# Altium PCB ArduinoUnoR0.PcbDoc (part 1 of 2)
Units mm, origin at the board's own origin, x right, y up, seen from the top; angles counter-clockwise.
Board outline 68.53 x 53.3 mm, 2 copper layers (Top Layer, Bottom Layer); 60 components, 49 nets, 220 pads, 58 vias.
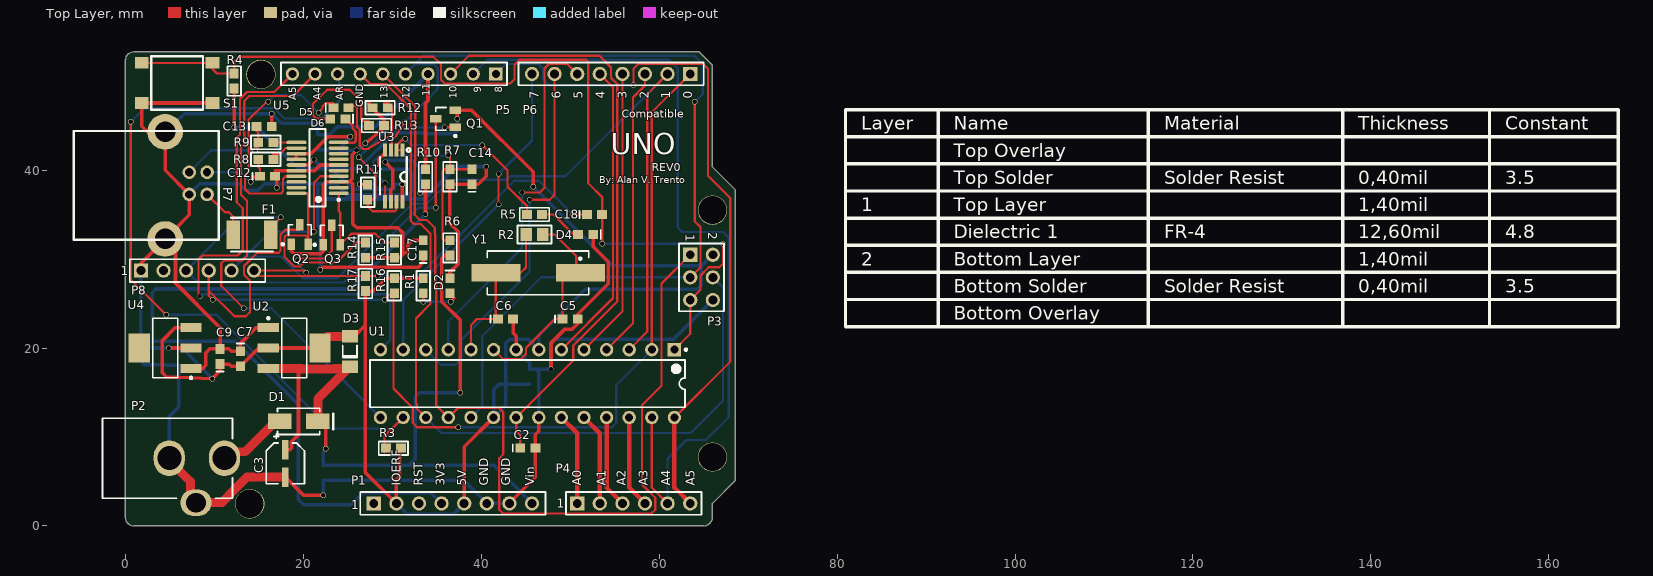
[diagram p0: Top Layer view]
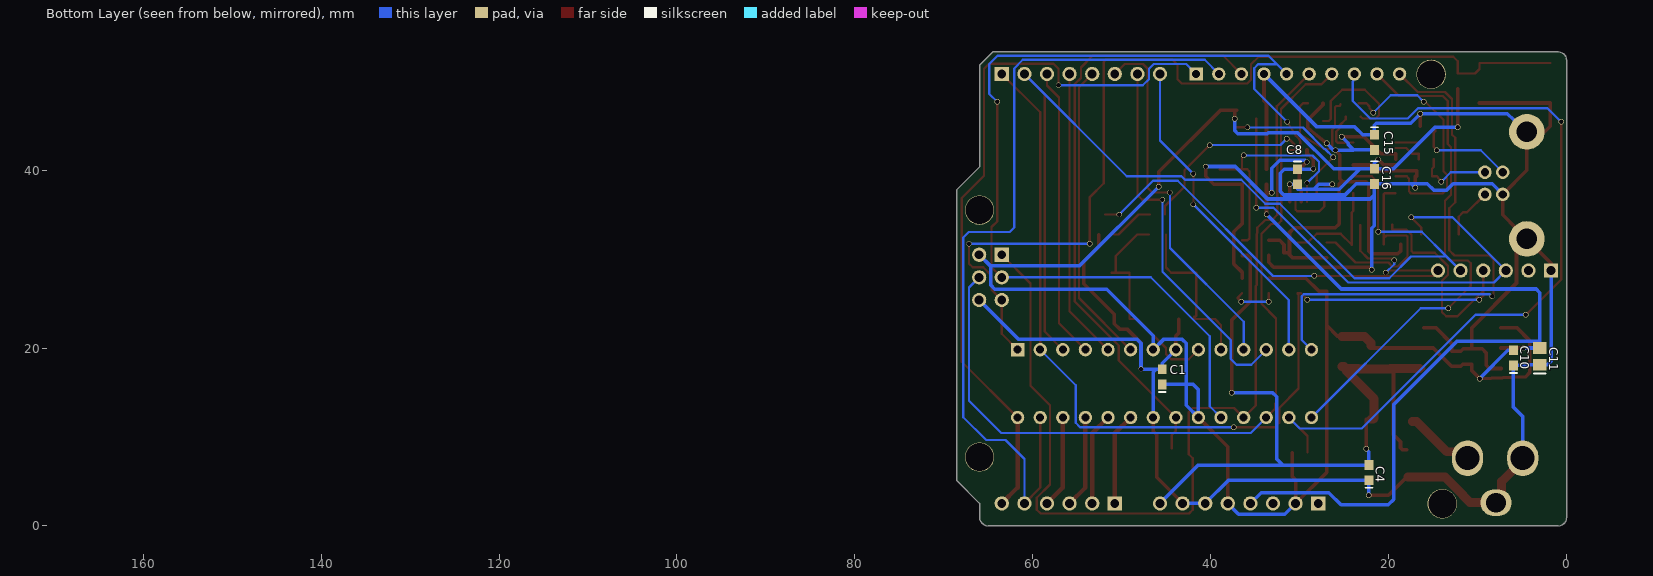
[diagram p1: Bottom Layer view, seen from below]
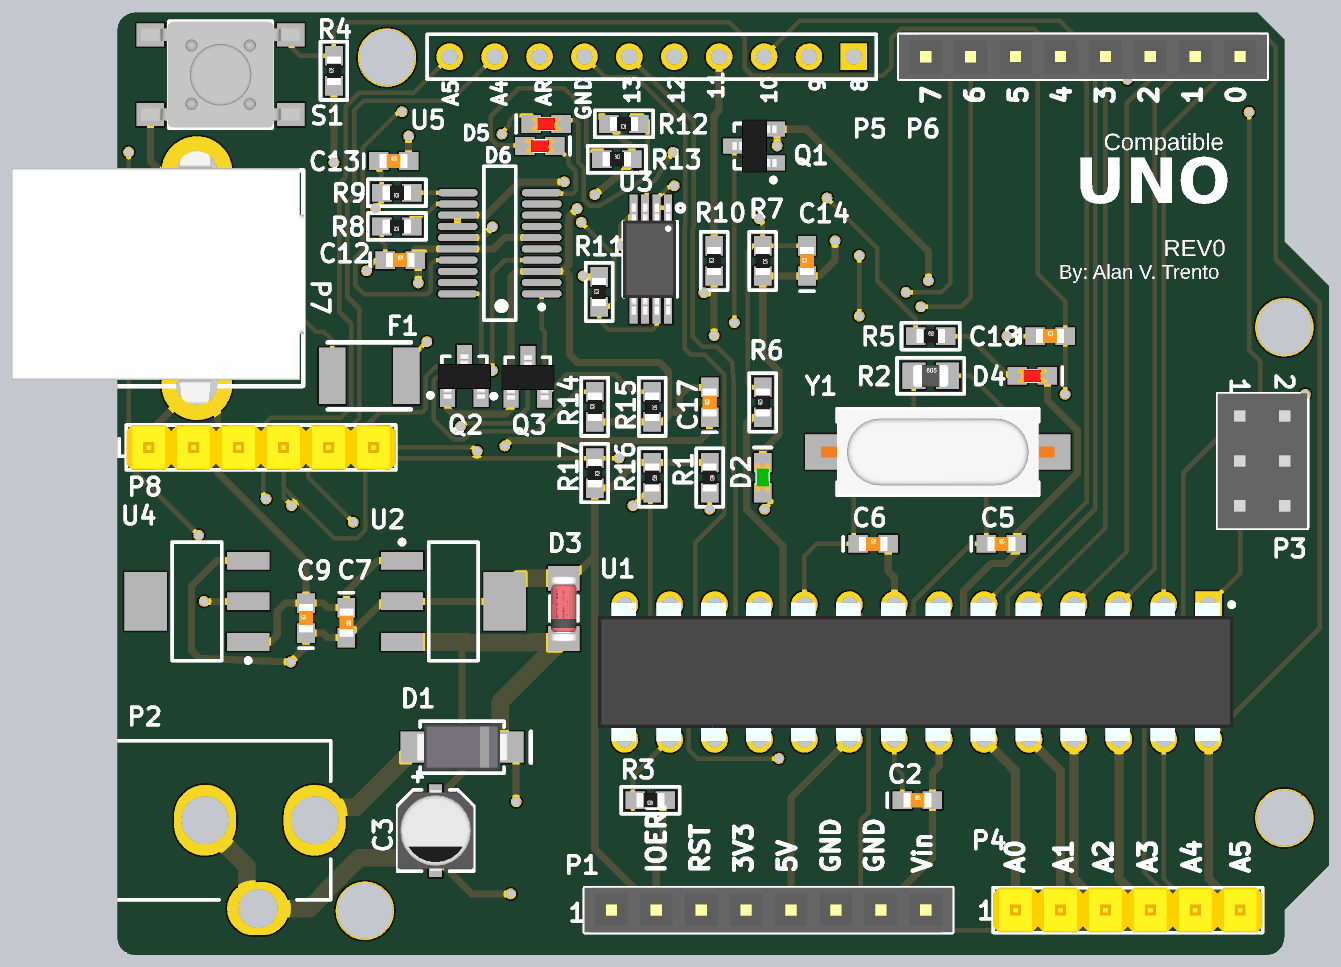
[diagram p2: 3D render of the assembled board from above, using the file's embedded part models]
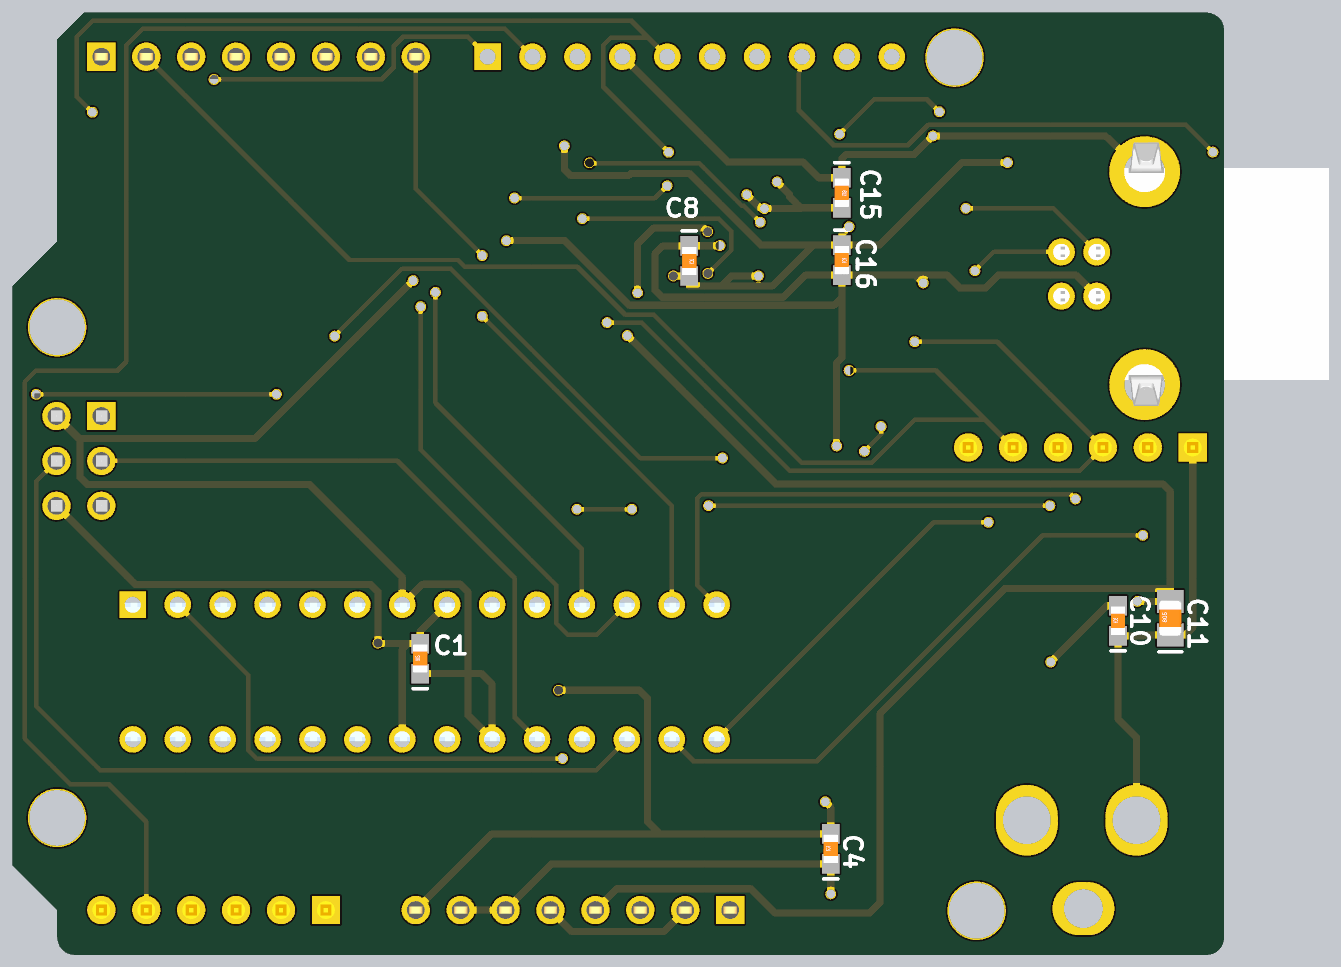
[diagram p3: 3D render of the assembled board from below, using the file's embedded part models]

## Layer stack, top to bottom
Top Solder: solder mask 0.0102, Solder Resist, Dk 3.5
Top Layer: signal copper 0.0356
Dielectric 1: dielectric 0.32, FR-4, Dk 4.8
Bottom Layer: signal copper 0.0356
Bottom Solder: solder mask 0.0102, Solder Resist, Dk 3.5

## Board outline
0.296,0.296 0.127,0.508 0.042,0.741 0,0.994 0,52.284 0.042,52.559 0.127,52.792 0.296,53.004 0.508,53.152 0.741,53.258 0.994,53.3 64.472,53.3 65.996,51.777 65.996,40.351 68.535,37.811 68.535,5.078 65.996,2.539 65.996,0.994 65.953,0.741 65.869,0.508 65.699,0.296 65.488,0.127 65.255,0.042 65.001,0 0.994,0 0.741,0.042 0.508,0.127

## Design rules (kind name [scope] priority, off if disabled: settings)
Clearance [All] p1: gap=0.2 ignorepadtopadclearanceinfootprint=FALSE
HoleSize [All] p1: absolutevalues=TRUE maxlimit=10 minlimit=0.025 maxpercent=80.000 minpercent=20.000
MinimumSolderMaskSliver [All] p1 off: minsoldermaskwidth=0.254
PolygonConnect [All] p1: connectstyle=Relief reliefconductorwidth=0.254 reliefentries=4 polygonreliefangle="90 Angle" airgapwidth=0.254
RoutingVias [All] p1: holewidth=0.508 width=0.61 viastyle="Through Hole" minholewidth=0.203 minwidth=0.406 maxholewidth=0.305 maxwidth=1.016
SilkToSilkClearance [All] p1 off: silktosilkclearance=0.254
SilkToSolderMaskClearance [IsPad] p1 off: minsilkscreentomaskgap=0.102 clearancetoexposedcopper=TRUE
SolderMaskExpansion [All] p1: expansion=0.102 istentingtop=FALSE
Width [InNetClass('OTHERS')] p1: maxlimit=0.5 minlimit=0.2 preferedwidth=0.254
Width Width_PowerNets [InNetClass('PowerNets')] p2: maxlimit=1 minlimit=0.254 preferedwidth=0.4
26 further rules are at their usual default settings.

## Classes and differential pairs
net class OTHERS: A0 A1 A2 A3 A4_SDA A5_SCL AREF D0_RX D1_TX D2 D3 D4 D5 D6 D7 D8 D9 D10_SS D11_MOSI D12_MISO D13_SCK DTR NetC5_1 NetC6_1 NetC12_1 NetC13_1 NetC14_2 NetD2_1 NetD4_1 NetD5_1 NetD5_2 NetD6_1 NetD6_2 NetF1_1 NetQ1_1 NetQ2_2 NetQ3_2 NetR5_1 NetR8_1 NetR9_1 R\S\T\ RST USB+
net class PowerNets: +3V3D +3V3E +5VD +VIN GND NetD1_1
component class U_Sheet2: C12 C13 C14 C15 C16 C17 C18 D5 D6 F1 P7 P8 Q1 Q2 Q3 R6 R7 R8 R9 R10 R11 R12 R13 R14 R15 R16 R17 U5
component class U_Sheet1: C1 C2 C3 C4 C5 C6 C7 C8 C9 C10 C11 D1 D2 D3 D4 P1 P2 P3 P4 P5 P6 R1 R2 R3 R4 R5 S1 U1 U2 U3 U4 Y1

## Components (designator, comment, footprint, x,y, rotation, side; value= is the part's Value field where it differs from the comment)
C1 "0.1uF 25V" C1608[0603] 45.466,16.764 r90 bottom value=1
C2 "0.1uF 25V" C1608[0603] 45.25,8.75 r0 top value=1
C3 "" Cap_Al_SMD_A5_4.3x4.3mm 18,7.024 r90 top value="47 uF 25V"
C4 "Capacitor" C1608[0603] 22.25,6 r90 bottom value="0.1uF 25V"
C5 "20pF" C1608[0603] 50,23.25 r0 top value=1
C6 "20pF" C1608[0603] 42.75,23.25 r0 top value=1
C7 "Capacitor" C1608[0603] 12.954,18.796 r270 top value="0.1uF 25V"
C8 "Capacitor" C1608[0603] 30.25,39.25 r270 bottom value="0.1uF 25V"
C9 "0.1uF 25V" C1608[0603] 10.668,19.05 r90 top value=1
C10 "0.1uF 25V" C1608[0603] 6,18.9 r90 bottom value=1
C11 "1uF 25V" C2012[0805] 3.048,19.05 r90 bottom
C12 "0.1uF 25V" C1608[0603] 16,39.298 r0 top value=1
C13 "0.1uF 25V" C1608[0603] 15.624,44.9 r0 top value=1
C14 "0.1uF 25V" C1608[0603] 39,39.25 r90 top value=1
C15 "0.1uF 25V" C1608[0603] 21.625,43.108 r270 bottom value=1
C16 "0.1uF 25V" C1608[0603] 21.625,39.298 r270 bottom value=1
C17 "0.1uF 25V" C1608[0603] 33.5,31.25 r90 top value=1
C18 "0.1uF 25V" C1608[0603] 52.75,35 r0 top value=1
D1 "B160-13-F" DO214AC 19.5,11.75 r0 top
D2 "LED" LED-0603-G 36.5,27 r90 top
D3 "LL4148" SOD-80/MLL34 25.25,19.602 r270 top
D4 "LED" LED-0603-R 51.75,32.75 r0 top
D5 "RX" LED-0603-R 24.25,47 r180 top
D6 "TX" LED-0603-R 23.9,45.75 r0 top
F1 "MF-MSMF050-2" MF-MSMF050 14.25,32.75 r0 top
P1 "Header 8" HDR1X8F 27.94,2.54 r0 top
P2 "Barrel Jack" BARREL2.5 -2.54,7.62 r0 top
P3 "ICSP" HDR2X3M 63.5,30.48 r270 top
P4 "Header 6" HDR1X6m 50.8,2.54 r0 top
P5 "IOH" HDR1X10 41.656,50.8 r180 top
P6 "IOL" HDR1X8F 63.5,50.8 r180 top
P7 "USB-B1HSB6" USB_Type_B 9.207,39.758 r270 top
P8 "PROG" HDR1X6m 1.778,28.702 r0 top
Q1 "FDN340P" SOT23 36,45.75 r90 top
Q2 "BSS138" SOT23 19.63,32.75 r0 top
Q3 "BSS138" SOT23 23.22,32.7 r0 top
R1 "270R" R1608[0603] 33.5,27 r270 top value=0
R2 "1M" R2012[0805] 46,32.75 r0 top value=0
R3 "100k" R1608[0603] 30.15,8.75 r180 top value=0
R4 "10k" R1608[0603] 12.25,50.006 r90 top value=0
R5 "560R" R1608[0603] 46,35 r0 top value=0
R6 "10k" R1608[0603] 36.5,31.25 r90 top value=0
R7 "10k" R1608[0603] 36.5,39.25 r270 top value=0
R8 "10k" R1608[0603] 15.807,41.203 r180 top value=0
R9 "10k" R1608[0603] 15.807,43.108 r180 top value=0
R10 "10k" R1608[0603] 33.75,39.25 r90 top value=0
R11 "10k" R1608[0603] 27.25,37.5 r90 top value=0
R12 "1k" R1608[0603] 28.65,47 r180 top value=0
R13 "1k" R1608[0603] 28.25,45 r0 top value=0
R14 "10k" R1608[0603] 27,31 r90 top value=0
R15 "10k" R1608[0603] 30.25,31 r270 top value=0
R16 "10k" R1608[0603] 30.25,27 r270 top value=0
R17 "10k" R1608[0603] 27,27.25 r270 top value=0
S1 "SW-PB" PB-SW-SMT 5.842,49.784 r180 top
U1 "ATmega328P-PU" DIP28 45.212,16.002 r270 top
U2 "Regulator" SOT223_N#1 19,20 r0 top
U3 "AMP Op" TSSOP8-1 31.15,42.25 r180 top
U4 "Regulator" SOT223_N#2 4.5,20 r180 top
U5 "FT231XS-R" NSSOP-20_N 21.625,40.25 r180 top
Y1 "16MHz" CRYSTAL-HC49/4H_SMX 46.402,28.448 r180 top

## Footprints (in the part's own frame and the unit in brackets; to place one, negate y for a bottom-side part, rotate by r counter-clockwise, add the part's x,y. Pads: shape width x height; smd on the part's side, far side on the other; paste and mask are expansions set on the pad)
BARREL2.5 [mm] "DC Power Jack, 2.5mm, KLD Series, PCB Mount"
  oval 3.5x4 hole 2.7: 1(13.7,0) 2(7.5,0)
  oval 3.5x3 hole 2.2: 3(10.5,-5)
  silkscreen extent 0,-4.5 14.6,4.5, body extent 0,-4.45 14.54,4.56, height 11
C1608[0603] [mm] "Chip Capacitor; Body 1.6 x 0.8 mm (LxW typ)"
  rect 1.1x1 smd: 1(-0.85,0) 2(0.85,0)
  silkscreen extent -1.7,-0.4 -1.7,0.4, body extent -0.8,-0.4 0.8,0.4, height 0.3
C2012[0805] [mm] "Chip Capacitor; Body 2.0 x 1.2 mm (LxW typ)"
  rect 1.3x1.5 smd: 1(-0.95,0) 2(0.95,0)
  silkscreen extent -1.9,-0.65 -1.9,0.65, body extent -1,-0.62 1,0.63, height 0.8
Cap_Al_SMD_A5_4.3x4.3mm [mm]
  rect 2.2x0.75 smd: 1(1.524,0) 2(-1.524,0)
  silkscreen extent -2.29,-2.15 3.31,2.15, body extent -2.29,-2.15 2.31,2.15, height 3.91
CRYSTAL-HC49/4H_SMX [mm] "Quartz Crystal, SM; Body 13.4 (inc. leads) x 4.9 mm (LxW max)"
  rect 5.5x2 smd: 1(-4.75,0) 2(4.75,0)
  silkscreen extent -5.7,-2.45 5.7,2.45, body extent -6.6,-2.4 6.6,2.4, height 4.32
DIP28 [mm] "28-Pin Plastic Dual In-Line Package (PDIP)"
  rect 1.5x1.5 hole 0.9: 1(-3.81,16.51)
  round 1.5 hole 0.9: 2(-3.81,13.97) 3(-3.81,11.43) 4(-3.81,8.89) 5(-3.81,6.35) 6(-3.81,3.81) 7(-3.81,1.27) 8(-3.81,-1.27) 9(-3.81,-3.81) 10(-3.81,-6.35) 11(-3.81,-8.89) 12(-3.81,-11.43) 13(-3.81,-13.97) 14(-3.81,-16.51) 15(3.81,-16.51) 16(3.81,-13.97) 17(3.81,-11.43) 18(3.81,-8.89) 19(3.81,-6.35) 20(3.81,-3.81) 21(3.81,-1.27) 22(3.81,1.27) 23(3.81,3.81) 24(3.81,6.35) 25(3.81,8.89) 26(3.81,11.43) 27(3.81,13.97) 28(3.81,16.51)
  silkscreen extent -3.93,-17.7 2.65,17.94, body extent -3.94,-18.03 3.94,17.91, height 4.65
DO214AC [mm]
  rect 2.65x1.75 smd: 1(-2.15,0) 2(2.15,0)
  silkscreen extent -2.37,-1.47 3.89,1.47, body extent -2.6,-1.3 2.6,1.3, height 2.4
HDR1X6m [mm] "Connector; Header; 6 Position"
  rect 1.6x1.6 hole 1: 1(0,0)
  round 1.6 hole 1: 2(2.54,0) 3(5.08,0) 4(7.62,0) 5(10.16,0) 6(12.7,0)
  silkscreen extent -1.27,-1.27 13.97,1.27, body extent -1.27,-1.27 13.97,1.27, height 9.55
HDR1X8F [mm] "Connector; Header; 8 Position"
  rect 1.6x1.6 hole 1: 1(0,0)
  round 1.6 hole 1: 2(2.54,0) 3(5.08,0) 4(7.62,0) 5(10.16,0) 6(12.7,0) 7(15.24,0) 8(17.78,0)
  silkscreen extent -1.52,-1.27 19.3,1.27, body extent -1.52,-1.27 19.3,1.27, height 8.55
HDR1X10 [mm] "Connector; Header; 10 Position"
  rect 1.5x1.5 hole 0.9: 1(0,0)
  round 1.5 hole 0.9: 2(2.54,0) 3(5.08,0) 4(7.62,0) 5(10.16,0) 6(12.7,0) 7(15.24,0) 8(17.78,0) 9(20.32,0) 10(22.86,0)
  silkscreen extent -1.27,-1.27 24.13,1.27
HDR2X3M [mm] "Connector; Header; 3x2 Position"
  rect 1.6x1.6 hole 1: 1(0,0)
  round 1.6 hole 1: 2(0,2.54) 3(2.54,0) 4(2.54,2.54) 5(5.08,0) 6(5.08,2.54)
  silkscreen extent -1.27,-1.27 6.35,3.81, body extent -1.27,-1.27 6.35,3.77, height 8.5
LED-0603-G [mm] "0603 Green LED"
  rect 1.1x1 smd: 1(-0.85,0) 2(0.85,0)
  silkscreen extent 1.7,-0.5 1.7,0.5, body extent -0.8,-0.4 0.8,0.4, height 0.6
LED-0603-R [mm] "0603 Red LED"
  rect 1.1x1 smd: 1(-0.85,0) 2(0.85,0)
  silkscreen extent 1.7,-0.5 1.7,0.5, body extent -0.8,-0.4 0.8,0.4, height 0.6
MF-MSMF050 [mm] "Resettable Fuse"
  rect 1.5x3.2 smd: 1(-2.1,0) 2(2.1,0)
  silkscreen extent -2.35,-1.9 2.35,1.9, body extent -2.35,-1.7 2.35,1.7, height 0.85
NSSOP-20_N [mm] "SOP, 20-Leads, Body 8.6x3.9mm, Pitch 0.635mm, IPC Medium Density"
  oval 2.25x0.4 smd: 1(-2.375,2.857) 2(-2.375,2.222) 3(-2.375,1.587) 4(-2.375,0.952) 5(-2.375,0.317) 6(-2.375,-0.318) 7(-2.375,-0.953) 8(-2.375,-1.588) 9(-2.375,-2.223) 10(-2.375,-2.858) 11(2.375,-2.858) 12(2.375,-2.223) 13(2.375,-1.588) 14(2.375,-0.953) 15(2.375,-0.318) 16(2.375,0.317) 17(2.375,0.952) 18(2.375,1.587) 19(2.375,2.222) 20(2.375,2.857)
  silkscreen extent -2.5,-4.35 0.9,4.35, body extent -1.99,-4.37 1.99,4.37, height 1.76
PB-SW-SMT [mm] "SMT TACT SWITCH 6MM"
  rect 1.55x1.3 smd: 1(-3.975,2.25) 1(3.975,2.25) 2(-3.975,-2.25) 2(3.975,-2.25)
  silkscreen extent -2.9,-3 2.9,3, body extent -4.5,-3 4.5,3, height 4.3
R1608[0603] [mm] "Chip Resistor; Body 1.6 x 0.8 mm (LxW typ)"
  rect 1.1x1 smd: 1(-0.85,0) 2(0.85,0)
  silkscreen extent -1.65,-0.76 1.65,0.76, body extent -0.8,-0.4 0.8,0.4, height 0.3
R2012[0805] [mm] "Chip Resistor; Body 2.0 x 1.3 mm (LxW typ)"
  rect 1.3x1.5 smd: 1(-0.95,0) 2(0.95,0)
  silkscreen extent -1.91,-1.02 1.9,1.02, body extent -1,-0.62 1,0.63, height 0.8
SOD-80/MLL34 [mm] "Metal Electrode Face (MELF) Diode; Body 3.5 x 1.7 mm (LxDia)"
  rect 1.4x1.8 smd: 1(-1.7,0) 2(1.7,0)
  silkscreen extent -0.7,-0.8 0.7,0.8, body extent -1.82,-0.8 1.88,0.8, height 1.6
SOT23 [mm] "SOT-23; 3 Leads; Body 3.0 x 2.6 mm, inc. leads (LxW max)"
  rect 0.85x1.3 smd: 1(-0.95,-1.1) 2(0.95,-1.1) 3(0,1.1)
  silkscreen extent -2.05,-1.22 1.28,1.1, body extent -1.5,-1.29 1.5,1.21, height 1.12
SOT223_N#1 [mm] "SOT223, 4-Leads, Body 6.5x3.5mm, Pitch 2.3mm, Lead Span 7mm, IPC Medium Density"
  rect 2.4x1 smd: 1(-2.9,2.3) 2(-2.9,0) 3(-2.9,-2.3)
  rect 2.4x3.3 smd: 2(2.9,0)
  silkscreen extent -3.02,-3.35 1.4,3.47, body extent -1.85,-3.35 1.85,3.35, height 1.7
SOT223_N#2 [mm] "SOT223, 4-Leads, Body 6.5x3.5mm, Pitch 2.3mm, Lead Span 7mm, IPC Medium Density"
  rect 2.4x1 smd: 1(-2.9,2.3) 2(-2.9,0) 3(-2.9,-2.3)
  rect 2.4x3.3 smd: 4(2.9,0)
  silkscreen extent -3.03,-3.35 1.4,3.47, body extent -1.85,-3.35 1.85,3.35, height 1.7
TSSOP8-1 [mm] "Footprint TSSOP81"
  rect 0.45x1.5 smd: 1(0,0) 2(0.65,0) 3(1.3,0) 4(1.95,0) 5(1.95,5.8) 6(1.3,5.8) 7(0.65,5.8) 8(0,5.8)
  silkscreen extent -0.9,-0.2 2.5,5, body extent -0.45,-0.24 2.55,6.04, height 1.09
USB_Type_B [mm]
  round 1.524 hole 0.92: 1(2.5,0) 2(0,0) 3(0,-2) 4(2.5,-2)
  round 4 hole 2.3: 5(-4.54,-4.71) 6(7.5,-4.71)
  silkscreen extent -4.62,-14.99 7.58,1.3, body extent -6.2,-15.15 8.7,1.35, height 10.7

## Part data
C1 C2 C9 C10 C12 C13 C14 C15 C16 C17 C18: library part C, "Capacitor", Capacitance=100nF, Case Code (Imperial)=0603, Case Code (Metric)=1608, Dielectric=X7R, Manufacturer Part Number=GCM188R71E104KA57D, Max Operating Temperature=125°C, Min Operating Temperature=-55°C, Package Quantity=4000, Ratings=AEC-Q200, Supplier Part Number 1=GCM188R71E104KA57D-ND, Tolerance=10%, Voltage=25V, Case/Package=0603, Depth=0.8mm, Height=0.8mm, Lead Free="Lead Free", Length=1.6mm, Mount="Surface Mount", Packaging="Tape and Reel", Radiation Hardening=No, Stock 1=0, Supplier 1=Digi-Key, Termination=SMD/SMT, Thickness=0.035inch, Voltage Rating=25V, Voltage Rating (DC)=25V, Width=0.8mm
C3: library part CP, "Polarized Capacitor"
C4 C7 C8: library part C
C5 C6: library part C, "Capacitor", Case Code (Imperial)=0603, Case Code (Metric)=1608, Dielectric=C0G, Manufacturer Part Number=CL10C200JB8NNNC, Max Operating Temperature=125°C, Min Operating Temperature=-55°C, Package Quantity=1, Supplier Part Number 1=1276-1187-6-ND, Temperature Coefficient=300ppm/°C, Tolerance=5%, Voltage=50V, Capacitance=20pF, Case/Package=0603, Depth=0.8mm, Height=0.8mm, Length=1.6mm, Mount="Surface Mount", Packaging="Tape and Reel", Pricing 1="1=0.1, 10=0.048, 100=0.0214, 500=0.01532, 1000=0.01203 (USD)", Radiation Hardening=No, Stock 1=40000, Supplier 1=Digi-Key, Thickness=0.035inch, Voltage Rating=50V, Width=0.031inch
C11: library part C, "Capacitor", Capacitance=1uF, Case Code (Imperial)=0805, Case Code (Metric)=2012, Dielectric=X7R, Dielectric Material=Ceramic, Manufacturer=TDK, Manufacturer Part Number=C2012X7R1E105K125AB, Max Operating Temperature=125°C, Min Operating Temperature=-55°C, Package Quantity=1, Supplier Part Number 1=445-1354-1-ND, Tolerance=10%, Voltage=25V, Case/Package=0805, Composition=Ceramic, Depth=1.25mm, Height=1.25mm, Lead Free="Lead Free", Length=2mm, Mount="Surface Mount", Number of Pins=2, Packaging="Tape and Reel", Pricing 1="1=0.16, 10=0.115, 100=0.054, 500=0.0379, 1000=0.03137 (USD)", Radiation Hardening=No, REACH SVHC="No SVHC", Stock 1=0, Supplier 1=Digi-Key, Termination=SMD/SMT, Thickness=0.057inch, Voltage Rating=25V, Voltage Rating (DC)=25V, Weight=0.000194oz, Width=1.25mm
D1 D3: library part D, "Diode"
D2: Supplier Part Number 1=31AK5817, Supplier 1=Newark
D4: Case Code (Imperial)=0603, Case Code (Metric)=1608, Colour=Red, Current=2A, Forward Current=30mA, Forward Voltage=2V, Lens Colour=Colorless, Manufacturer Part Number=LTST-C191KRKT, Max Operating Temperature=85°C, Min Operating Temperature=-55°C, Package Quantity=1, Power Dissipation=75mW, Reverse Voltage=5V, Supplier Part Number 1=160-1447-6-ND, Test Current=20mA, Case/Package=0603, Depth=0.8mm, Dominant Wavelength=631nm, Height=0.55mm, Illumination Colour=Red, Lead Free="Lead Free", Length=1.6mm, Lens Style=Clear,Colorless,Diffused,Rectangular, Lens Transparency=Clear, Luminous Intensity=54mcd, Mount="Surface Mount", Number of Elements=1, Number of LEDs=1, Number of Pins=2, Packaging="Tape and Reel", Power Rating=75mW, Pricing 1="1=0.29, 10=0.211, 25=0.1556, 100=0.1111, 250=0.07556, 500=0.06666, 1000=0.05222, 2500=0.05111 (USD)", Radiation Hardening=No, Stock 1=978989, Supplier 1=Digi-Key, Viewing Angle=130°, Voltage=2V, Wavelength=639nm, Width=0.8mm
D5 D6: library part LED, "LED", Case Code (Imperial)=0603, Case Code (Metric)=1608, Colour=Yellow, Forward Current=30mA, Forward Voltage=2.4V, Lens Colour=Clear,Colorless, Manufacturer Part Number=LTST-C190KSKT, Max Operating Temperature=85°C, Min Operating Temperature=-55°C, Package Quantity=1, Power Dissipation=75mW, Reverse Voltage=5V, Supplier Part Number 1=160-1437-1-ND, Test Current=20mA, Case/Package=0603, Depth=1.6mm, Dominant Wavelength=597nm, Height=0.8mm, Illumination Colour=Yellow, Lead Free="Lead Free", Length=3.2mm, Lens Style=Clear,Colorless,Diffused,Rectangular, Lens Transparency=Clear, Luminous Intensity=180mcd, Mount="Surface Mount", Number of Elements=1, Number of LEDs=1, Number of Pins=2, Packaging="Tape and Reel", Power Rating=75mW, Pricing 1="1=0.29, 10=0.215, 25=0.16, 100=0.1153, 250=0.0798, 500=0.07088, 1000=0.05644 (USD)", Radiation Hardening=No, Stock 1=422639, Supplier 1=Digi-Key, Viewing Angle=130°, Wavelength=588nm, Width=0.8mm
F1: "Resettable Fuse", Case Code (Imperial)=1812, Case Code (Metric)=4532, Current Rating=100A, Hold Current=500mA, Max Operating Temperature=85°C, Min Operating Temperature=-40°C, Operating Supply Voltage=15V, Package Quantity=2000, Power Dissipation=800mW, Resistance=150mR, Supplier Part Number 1=MF-MSMF050-2DKR-ND, Trip Current=1A, Approvals=CSA,TUV,UL, Case/Package=1812, Contact Plating=Gold, Height=0.85mm, Lead Free="Lead Free", Length=4.73mm, Manufacturer Part Number=MF-MSMF050-2, Max Current Rating=100A, Mount="PCB,Surface Mount", Number of Terminals=2, Packaging="Tape and Reel", Pricing 1="1=0.47, 5=0.456, 10=0.441, 50=0.3712, 100=0.3082, 250=0.2802, 500=0.23816, 1000=0.21014 (USD)", Radiation Hardening=No, REACH SVHC="No SVHC", Stock 1=179041, Supplier 1=Digi-Key, Terminal Material=Gold, Termination=SMD/SMT, Time to Trip=0.15s, Voltage Rating=15V, Voltage Rating (DC)=15V, Width=3.41mm
P1: "Header, 8-Pin", LatestRevisionDate=17-Jul-2002, LatestRevisionNote="Re-released for DXP Platform.", Publisher="Altium Limited"
P2: library part PWR2.5, "Low Voltage Power Supply Connector", Manufacturer="Memory Protection Devices", Manufacturer Part Number=EJ503A, Supplier Part Number 1=EJ503A-ND, Pricing 1="1=2.7, 10=2.447, 100=2.0977, 500=1.74806, 1000=1.49834 (USD)", Stock 1=1084, Supplier 1=Digi-Key
P3: library part "Header 3X2", "Header, 3-Pin, Dual row", Colour=Black, Contact Resistance=25mR, Manufacturer=Harwin, Manufacturer Part Number=M20-9720345, Max Current Rating=3A, Max Operating Temperature=105°C, Min Operating Temperature=-40°C, Package Quantity=1000, Supplier Part Number 1=952-1921-ND, Connector Type="Male Pin", Contact Material=Brass, Contact Mating Length=0.276inch, Contact Plating=Gold, Depth=5.08mm, Gender=Male, Housing Colour=Black, Housing Material=Nylon, LatestRevisionDate=17-Jul-2002, LatestRevisionNote="Re-released for DXP Platform.", Length=7.62mm, Mount="Through Hole", Number of Contacts=6, Number of Positions=6, Number of Rows=2, Orientation=Straight, Packaging=Bulk, Pitch=2.54mm, Pricing 1="1=0.33, 10=0.308, 100=0.2156, 500=0.1848, 1000=0.154, 5000=0.132, 10000=0.1232 (USD)", Publisher="Altium Limited", Radiation Hardening=No, Row Spacing=0.1inch, Stock 1=4637, Supplier 1=Digi-Key, Termination=Solder
P4: "Header, 6-Pin", LatestRevisionDate=17-Jul-2002, LatestRevisionNote="Re-released for DXP Platform.", Publisher="Altium Limited"
P5: library part "Header 10", "Header, 10-Pin", LatestRevisionDate=17-Jul-2002, LatestRevisionNote="Re-released for DXP Platform.", Publisher="Altium Limited"
P6: library part "Header 8", "Header, 8-Pin", Colour=Black, Manufacturer=Sullins, Manufacturer Part Number=PPTC081LFBN-RC, Package Quantity=1000, Supplier Part Number 1=S7006-ND, Connector Type=Header,Socket, Contact Material=Bronze, Contact Plating=Tin, Height=8.5mm, Housing Material=Plastic, LatestRevisionDate=17-Jul-2002, LatestRevisionNote="Re-released for DXP Platform.", Lead Free="Lead Free", Length=20.8mm, Mount="Through Hole", Number of Positions=8, Number of Rows=1, Packaging=Bulk, Pitch=0.1inch, Pricing 1="1=0.65, 10=0.608, 400=0.42525, 800=0.3645, 1200=0.33413, 5200=0.29363, 10000=0.2925 (USD)", Publisher="Altium Limited", Stock 1=21933, Supplier 1=Digi-Key, Termination=Solder, Width=2.5mm
P7: library part "USB Type B", "Conn USB Type B RCP 4 POS 2.5mm Solder RA Thru-Hole 4 Terminal 1 Port", Manufacturer="On-Shore Technology", Package Quantity=50, Category=Connectors, ComponentLink1Description=https://datasheet.ciiva.com/851/usb-b1hsxx-851167.pdf?src-supplier=Digi-Key, ComponentLink1URL=https://datasheet.ciiva.com/851/usb-b1hsxx-851167.pdf?src-supplier=Digi-Key, Connector Type=USB, Gender=Receptacle, Manufacturer Part Number=USB-B1HSB6, Mount="Through Hole,Horizontal", Number of Contacts=4, Packaging=Tray, Pricing 1="1=1,04980, 10=0,96820, 25=0,84920, 50=0,81630, 100=0,71590, 500=0,70860 (USD)", RoHS=Yes, RoHS Compliant=Yes, Stock 1=72, Supplier 1="Arrow Electronics", Supplier Part Number 1=USB-B1HSB6
P8: library part "Header 6", "Header, 6-Pin", Colour=Black, Current Rating=3A, Flammability Rating="UL94 V-0", Insulation Resistance=5GR, Manufacturer="Amphenol FCI", Manufacturer Part Number=68000-406HLF, Max Operating Temperature=125°C, Max Voltage Rating (AC)=1.5kV, Min Operating Temperature=-65°C, Package Quantity=100, Supplier Part Number 1=609-3263-ND, Connector Type="Male Pin", Contact Gender=Male, Contact Material=Bronze, Contact Mating Length=0.23inch, Contact Plating=Tin, Depth=2.41mm, Gender=Male, Housing Colour=Black, Housing Material=Thermoplastic, LatestRevisionDate=17-Jul-2002, LatestRevisionNote="Re-released for DXP Platform.", Length=15.24mm, Mating Post Length=5.84mm, Mount="Through Hole", Number of Contacts=6, Number of Positions=6, Number of Rows=1, Orientation=Straight, Packaging=Bulk, Pitch=2.54mm, Pricing 1="1=0.26, 10=0.245, 100=0.1695, 500=0.14344, 1000=0.11736, 5000=0.10432, 10000=0.09454 (USD)", Publisher="Altium Limited", Radiation Hardening=No, REACH SVHC="No SVHC", Stock 1=7266, Supplier 1=Digi-Key, Termination=Solder, Termination Post Length=2.41mm, Voltage Rating=1.5kV
Q1: library part MOSFET-P, "P-Channel MOSFET", Case/Package=SOT-23, Continuous Drain Current (ID)=2A, Current Rating=-2A, Drain to Source Breakdown Voltage=-20V, Drain to Source Resistance=60mR, Drain to Source Voltage (Vdss)=20V, Gate to Source Voltage (Vgs)=8V, Input Capacitance=779pF, Max Operating Temperature=150°C, Max Power Dissipation=500mW, Min Operating Temperature=-55°C, On-State Resistance=70MR, Package Quantity=1, Supplier Part Number 1=FDN340PDKR-ND, Threshold Voltage=-800mV, Contact Plating=Matte,Tin, Dual Supply Voltage=-20V, Element Configuration=Single, Fall Time=11ns, Height=0.94mm, Lead Free="Lead Free", Length=2.92mm, Manufacturer Part Number=FDN340P, Mount="Surface Mount", Nominal Vgs=-800mV, Number of Elements=1, Number of Pins=3, Packaging="Tape and Reel", Power Dissipation=500mW, Radiation Hardening=No, Rds On Max=70mR, REACH SVHC="No SVHC", Rise Time=9ns, Stock 1=0, Supplier 1=Digi-Key, Termination=SMD/SMT, Turn-Off Delay Time=27ns, Turn-On Delay Time=10ns, Voltage Rating (DC)=-20V, Weight=0.03g, Width=3.05mm
Q2 Q3: library part MOSFET-N, "N-Channel MOSFET", Case/Package=SOT-23, Continuous Drain Current (ID)=220mA, Drain to Source Breakdown Voltage=50V, Drain to Source Resistance=3.5R, Gate to Source Voltage (Vgs)=20V, Input Capacitance=27pF, Max Operating Temperature=150°C, Max Power Dissipation=360mW, Min Operating Temperature=-55°C, On-State Resistance=6R, Package Quantity=1, Supplier Part Number 1=BSS138CT-ND, Threshold Voltage=1.3V, Contact Plating=Matte,Tin, Current Rating=220mA, Drain to Source Voltage (Vdss)=50V, Dual Supply Voltage=50V, Element Configuration=Single, Fall Time=9ns, Height=0.93mm, Lead Free="Lead Free", Length=2.92mm, Manufacturer Part Number=BSS138, Mount="Surface Mount", Nominal Vgs=1.3V, Number of Elements=1, Number of Pins=3, Packaging="Tape and Reel", Power Dissipation=360mW, Radiation Hardening=No, Rds On Max=3.5R, REACH SVHC="No SVHC", Rise Time=9ns, Stock 1=0, Supplier 1=Digi-Key, Termination=SMD/SMT, Turn-Off Delay Time=20ns, Turn-On Delay Time=2.5ns, Voltage Rating (DC)=50V, Weight=0.03g, Width=1.3mm
R1: library part R, "Resistor"
R2: library part R, "Resistor", Case Code (Imperial)=0805, Case Code (Metric)=2012, Manufacturer Part Number=ERA-6AEB105V, Max Operating Temperature=155°C, Max Power Dissipation=125mW, Min Operating Temperature=-55°C, Package Quantity=1, Resistance=1MR, Supplier Part Number 1=P1MDADKR-ND, Temperature Coefficient=25ppm/°C, Tolerance=1%, Voltage Rating=100V, Case/Package=0805, Composition="Thin Film", Contact Plating=Tin, Depth=1.25mm, Features="Automotive AEC-Q200", Height=0.5mm, Lead Free="Lead Free", Length=2mm, Military Standard=Not, Mount="Surface Mount", Number of Pins=2, Number of Terminations=2, Packaging="Tape and Reel", Power Rating=125mW, Pricing 1="1=0.36, 10=0.302, 100=0.1182, 1000=0.04948, 2500=0.04536 (USD)", Radiation Hardening=No, REACH SVHC="No SVHC", Stock 1=150805, Supplier 1=Digi-Key, Termination=Solder, Voltage Rating (DC)=100V, Width=1.25mm, Working Voltage=100V
R3: library part R, "Resistor", Case Code (Imperial)=0603, Case Code (Metric)=1608, Manufacturer Part Number=MCT06030C1003FP500, Max Operating Temperature=125°C, Max Power Dissipation=125mW, Min Operating Temperature=-55°C, Package Quantity=1, Power Rating=100mW, Resistance=100kR, Supplier Part Number 1=MCT0603-100K-CFDKR-ND, Temperature Coefficient=50ppm/°C, Tolerance=1%, Voltage Rating=75V, Case/Package=0603, Composition="Thin Film", Contact Plating=Tin, Depth=0.85mm, Height=0.022inch, Lead Free="Lead Free", Length=1.55mm, Military Standard=Not, Mount="Surface Mount", Number of Terminations=2, Packaging="Tape and Reel", Pricing 1="1=0.18, 10=0.152, 100=0.0596, 1000=0.02495, 2500=0.02287 (USD)", Radiation Hardening=No, REACH SVHC=Unknown, Stock 1=0, Supplier 1=Digi-Key, Termination=SMD/SMT, Voltage Rating (DC)=75V, Weight=7.1E-05oz, Width=0.033inch
R4 R6 R7 R8 R9 R10 R11 R14 R15 R16 R17: library part R, "Resistor", Case Code (Imperial)=0603, Case Code (Metric)=1608, Manufacturer Part Number=MCT06030C1002FP500, Max Operating Temperature=125°C, Max Power Dissipation=125mW, Min Operating Temperature=-55°C, Package Quantity=1, Power Rating=100mW, Resistance=10kR, Supplier Part Number 1=MCT0603-10.0K-CFDKR-ND, Temperature Coefficient=50ppm/°C, Tolerance=1%, Voltage Rating=75V, Case/Package=0603, Composition="Thin Film", Contact Plating=Tin, Depth=0.85mm, Height=0.022inch, Lead Free="Lead Free", Length=1.55mm, Military Standard=Not, Mount="Surface Mount", Number of Terminations=2, Packaging="Tape and Reel", Pricing 1="1=0.18, 10=0.152, 100=0.0596, 1000=0.02495, 2500=0.02287 (USD)", Radiation Hardening=No, REACH SVHC=Unknown, Stock 1=1373195, Supplier 1=Digi-Key, Voltage Rating (DC)=75V, Width=0.8mm
R5: library part R, "Resistor", Case Code (Imperial)=0603, Case Code (Metric)=1608, Manufacturer Part Number=AC0603FR-07560RL, Max Operating Temperature=155°C, Max Power Dissipation=100mW, Min Operating Temperature=-55°C, Supplier Part Number 1=YAG3618DKR-ND, Temperature Coefficient=100ppm/°C, Tolerance=1%, Voltage Rating=50V, Case/Package=0603, Composition="Thick Film", Features="Automotive AEC-Q200,Moisture Resistant", Height=0.022inch, Lead Free="Lead Free", Length=0.063inch, Number of Terminations=2, Packaging="Tape and Reel", Power Rating=100mW, Pricing 1="1=0.1, 10=0.032, 100=0.0129, 1000=0.00579, 2500=0.00502 (USD)", Resistance=560R, Stock 1=31951, Supplier 1=Digi-Key, Termination=SMD/SMT, Weight=7.1E-05oz, Width=0.8mm
R12 R13: library part R, "Resistor", Case Code (Imperial)=0603, Case Code (Metric)=1608, Manufacturer Part Number=ESR03EZPJ102, Max Operating Temperature=155°C, Max Power Dissipation=250mW, Min Operating Temperature=-55°C, Package Quantity=1, Resistance=1kR, Supplier Part Number 1=RHM1.0KDDKR-ND, Temperature Coefficient=200ppm/°C, Tolerance=5%, Case/Package=0603, Composition="Thick Film", Features="Automotive AEC-Q200", Height=0.022inch, Lead Free="Lead Free", Length=0.063inch, Number of Terminations=2, Packaging="Tape and Reel", Pricing 1="1=0.1, 10=0.087, 100=0.0333, 1000=0.01464, 2500=0.01264 (USD)", Stock 1=384185, Supplier 1=Digi-Key, Width=0.031inch
S1: library part "SW Tact", "Tactile Switch", Case/Package=SMD/SMT, Colour=Black, Contact Resistance=100mR, Current Rating=50mA, Manufacturer Part Number=PTS645SM43SMTR92LFS, Max Operating Temperature=60°C, Max Voltage Rating (DC)=12V, Min Operating Temperature=-20°C, Operating Force=160gf, Package Quantity=1000, Supplier Part Number 1=CKN9112DKR-ND, Actuator Length=0.85mm, Actuator Material=Nylon,Polyamide, Actuator Type=Standard, Contact Material=Silver, Contact Plating=Silver, Depth=9mm, Illumination Type=Illuminated,Non-Illuminated, Lead Free="Lead Free", Length=6mm, Max Current Rating=50mA, Mechanical Life=100000Cycles, Mount="Surface Mount", Orientation=Straight, Packaging="Tape and Reel", Pricing 1="1=0.16, 10=0.157, 25=0.1516, 50=0.1462, 100=0.1381, 250=0.12996, 500=0.12452 (USD)", REACH SVHC="No SVHC", Stock 1=477790, Supplier 1=Digi-Key, Switch Function=Off-Mom, Termination="Gull Wing", Throw Configuration=SPST, Voltage Rating (DC)=12V
U1: "8-bit AVR Microcontroller, 32KB Flash, 1KB EEPROM, 2KB SRAM, 28-pin PDIP, Industrial Grade (-40°C to 85°C)", ComponentLink1Description="Manufacturer URL", ComponentLink1URL=http://www.atmel.com/, ComponentLink2Description="ATmega48A/48PA/88A/88PA/168A/168PA/328/328P Datasheet", ComponentLink2URL=http://www.atmel.com/dyn/resources/prod_documents/8271.pdf, ComponentLink3Description="ATmega48A/48PA/88A/88PA/168A/168PA/328/328P Summary", ComponentLink3URL=http://www.atmel.com/dyn/resources/prod_documents/8271S.pdf, DatasheetVersion="revD, May-2011", PackageDescription="28-lead (0.300\"/7.62mm Wide) Plastic Dual Inline Package (PDIP)", PackageReference=28P3, PackageVersion="revB, Sep-2001"
U2: Package Type=NCP1117ST50T3G
U3: library part LM358PWR, "IC OPAMP GP 700KHZ 8TSSOP", Case/Package=TSSOP, Input Bias Current=250nA, Input Offset Voltage (Vos)=7mV, Manufacturer="Texas Instruments", Max Dual Supply Voltage=16V, Max Operating Temperature=70°C, Max Supply Voltage=32V, Min Dual Supply Voltage=1.5V, Min Operating Temperature=0°C, Min Supply Voltage=3V, Nominal Supply Current=1.2mA, Operating Supply Current=1mA, Output Current=30mA, Package Quantity=1, Quiescent Current=600mA, Supplier Part Number 1=595-LM358PWR, Voltage Gain=100dB, Bandwidth=700kHz, Category="Amplifiers - Op Amps, Buffer, Instrumentation", Common Mode Rejection Ratio=65dB, ComponentLink1Description=https://datasheet.ciiva.com/1795/lm358-1795509.pdf?src-supplier=Digi-Key, ComponentLink1URL=https://datasheet.ciiva.com/1795/lm358-1795509.pdf?src-supplier=Digi-Key, ComponentLink2Description=https://datasheet.ciiva.com/1795/lm358-1795508.pdf?src-supplier=Digi-Key, ComponentLink2URL=https://datasheet.ciiva.com/1795/lm358-1795508.pdf?src-supplier=Digi-Key, ComponentLink3Description=https://datasheet.ciiva.com/1795/lm358-1795510.pdf?src-supplier=Digi-Key, ComponentLink3URL=https://datasheet.ciiva.com/1795/lm358-1795510.pdf?src-supplier=Digi-Key, ComponentLink4Description=https://datasheet.ciiva.com/48706/001072378-da-01-en-ic-opamp-gp-700khz-lm358pwr-tssop-8-tid-48706711.pdf?src-supplier=Conrad, ComponentLink4URL=https://datasheet.ciiva.com/48706/001072378-da-01-en-ic-opamp-gp-700khz-lm358pwr-tssop-8-tid-48706711.pdf?src-supplier=Conrad, Gain Bandwidth Product=700kHz, Lead Free="Lead Free", Manufacturer Part Number=LM358PWR, Mount="Surface Mount", Number of Amplifiers=2, Number of Channels=2, Number of Circuits=2, Number of Elements=2, Number of Pins=8, Operating Supply Voltage=16V, Output Current per Channel=30mA, Packaging="Tape and Reel", Pricing 1="1=0,50000, 10=0,38200, 50=0,38200, 100=0,20100, 500=0,16300, 1000=0,12600, 2000=0,10600, 10000=0,10600 (USD)", Radiation Hardening=No, REACH SVHC="No SVHC", RoHS=Yes, RoHS Compliant=Yes, Slew Rate=0.3V/µs, Supplier 1=Mouser, Unity Gain Bandwidth Product=700kHz
U4: Case/Package=SOT-223, Dropout Voltage=1.07V, Input Bias Current=6mA, Manufacturer="ON Semiconductor", Manufacturer Part Number=NCP1117ST33T3G, Max Input Voltage=20V, Max Operating Temperature=125°C, Max Output Current=1A, Max Output Voltage=3.3V, Max Supply Voltage=15V, Min Input Voltage=3.5V, Min Operating Temperature=0°C, Min Supply Voltage=4.75V, Output Voltage Accuracy=1%, Package Quantity=1, Quiescent Current=10mA, Reference Voltage=1.25V, Supplier Part Number 1=NCP1117ST33T3GOSDKR-ND, Accuracy=1%, Contact Plating=Matte,Tin, Halogen Free="Halogen Free", Height=1.69mm, Lead Free="Lead Free", Length=6.7mm, Min Current Limit=1A, Min Output Voltage=3.3V, Mount="Surface Mount", Nominal Output Voltage=3.3V, Number of Outputs=1, Number of Pins=3, Number of Regulators=1, Output Current=1A, Output Type=Fixed, Output Voltage=3.3V, Packaging="Tape and Reel", Polarity=Positive, Pricing 1="1=0.52, 10=0.444, 100=0.3315, 500=0.26048, 1000=0.20129 (USD)", Radiation Hardening=No, REACH SVHC="No SVHC", Stock 1=58869, Supplier 1=Digi-Key, Termination=SMD/SMT, Width=3.7mm
U5: "USB to Full-Handshake UART Interface Chip, UHCI/OHCI/EHCI Compatible, USB 2.0 Compatible, -40 to +85 degC, 20-Pin SSOP, Pb-Free, Tape and Reel", Case/Package=SSOP, Manufacturer=FTDI, Max Operating Temperature=85°C, Max Supply Voltage=5.5V, Min Operating Temperature=-40°C, Min Supply Voltage=2.97V, Operating Supply Current=8mA, Operating Supply Voltage=5V, Package Quantity=2000, Supplier Part Number 1=768-1129-6-ND, Code_JEDEC=MO-137-AD, ComponentLink1Description="Manufacturer URL", ComponentLink1URL=http://www.ftdichip.com/, ComponentLink2Description=Datasheet, ComponentLink2URL=http://www.ftdichip.com/Support/Documents/DataSheets/ICs/DS_FT231X.pdf, ComponentLink3Description="FT231X Product Page", ComponentLink3URL=www.ftdichip.com/Products/ICs/FT231X.html, ComponentLink4Description=http://uk.rs-online.com/webdocs/1102/0900766b811020d3.pdf, ComponentLink4URL=http://uk.rs-online.com/webdocs/1102/0900766b811020d3.pdf, ComponentLink5Description=https://media.digikey.com/pdf/Data%20Sheets/FTDI%20Chip%20PDFs/X-Chip_Series_Errata.pdf, ComponentLink5URL=https://media.digikey.com/pdf/Data%20Sheets/FTDI%20Chip%20PDFs/X-Chip_Series_Errata.pdf, ComponentLink6Description=http://www.alliedelec.com/images/products/datasheets/bm/FTDI/70403932.pdf, ComponentLink6URL=http://www.alliedelec.com/images/products/datasheets/bm/FTDI/70403932.pdf, Data Rate=12Mbps, DatasheetVersion="ver 1.2, Feb-2013", Height=0.059inch, Interface=UART,USB, Length=8.74mm, Manufacturer Part Number=FT231XS-R, Mount="Surface Mount", Number of Channels=1, Number of Pins=20, PackageDescription="20-Pin Small Outline Package, 8.6 x 3.9 mm Body, 0.635 mm Pitch", PackageReference=SSOP-20, PackageVersion=Feb-13, Packaging="Tape and Reel", PartNumber=FT231XS-R, Pricing 1="1=2.12, 25=2.05, 100=1.98, 250=1.78, 500=1.60002 (USD)", Radiation Hardening=No, Stock 1=8392, Supplier 1=Digi-Key, Weight=0.016oz, Width=0.157inch
Y1: library part XTAL, "Crystal Oscillator", ESR (Equivalent Series Resistance)=50R, Frequency Stability=50ppm, Frequency Tolerance=30ppm, Load Capacitance=20pF, Manufacturer Part Number=ECS-160-20-3X-TR, Max Operating Temperature=70°C, Min Operating Temperature=-10°C, Package Quantity=1, Supplier Part Number 1=XC1776DKR-ND, Frequency=16MHz, Height=0.091inch, Lead Free="Lead Free", Length=0.276inch, Mount="Surface Mount", Packaging="Tape and Reel", Pricing 1="1=0.38, 10=0.316, 50=0.2846, 100=0.253, 500=0.24036, 1000=0.2024 (USD)", Stock 1=30831, Supplier 1=Digi-Key, Termination=SMD/SMT, Tolerance=30ppm, Width=0.161inch

## Free pads (board coordinates)
  round 3.3 hole 3.15: 3(14,2.5) 4(66,7.75) 5(66,35.5) 6(15.25,50.75)

## Via types
v1: diameter 0.61, hole 0.508, Top Layer to Bottom Layer, 58 vias

## Nets (pads, with @x,y where several pads share a name; then routed paths per layer and width w, separated by ;. In a path a pad name is that pad's centre, name@x,y a point inside that pad or via, vN(x,y) a via of type N, cw(c..) or ccw(c..) an arc to the next point about the centre after c; other vN are vias at no path point)
+3V3D: C11.2 P1.4 R10.1 U3.6 U4.2 | length 108.5
  Top Layer w0.4: v1(4.911,20) U4.2 ; v1(29.211,40.905) 30.076,40.039 30.076,38.014 29.85,37.787 U3.6 ; v1(33.173,37.45) 33.58,37.45 33.75,37.62 ; v1(33.75,35.03) 33.75,37.62 ; R10.1 33.75,37.62
  Bottom Layer w0.4: v1(4.911,20) C11.2 3.048,20.737 ; v1(29.211,40.905) 29.414,41.108 32.259,41.108 33.173,40.193 v1(33.173,37.45) ; v1(33.75,35.03) 25.35,26.63 3.454,26.63 3.048,26.223 3.048,20.737 ; P1.4 34.356,3.744 26.747,3.744 25.376,2.373 20.067,2.373 19.457,2.982 19.457,13.65 12.371,20.737 3.048,20.737
+3V3E: C15.2 C17.2 Q2.1 Q3.1 R12.2 R13.2 R14.1 R15.2 U5.3 U5.13 U5.14 | length 61.6
  Top Layer w0.4: Q2.1 18.68,30.897 18.985,30.592 21.965,30.592 22.27,30.897 Q3.1 22.27,38.358 22.575,38.663 U5.3 25.166,38.663 ; U5.14 U5.13 20.88,41.838 22.649,43.607 22.766,43.724 v1(25.282,43.724) ; v1(25.999,42.214) 25.534,41.73 25.528,41.187 25.528,39.025 25.166,38.663 ; R14.1 R15.2 30.837,30.15 31.167,30.48 31.167,30.694 ; v1(27,43) 28.866,44.522 29.1,44.756 29.1,45.5 29.1,45.629 27.4,47.329 R12.2@27.4,47.5 ; C17.2 32.259,32.1 31.783,31.623 31.783,30.694 31.167,30.694 ; 25.166,38.663 25.35,38.663 25.579,38.434 25.579,33.945 26.011,33.513 30.633,33.513 31.167,32.98 31.167,30.694
  Bottom Layer w0.4: C15.2 23.96,42.257 ; v1(25.282,43.724) 24.573,43.014 24.573,42.871 23.96,42.257 ; v1(27,43) 26.254,42.254 26.039,42.254 v1(25.999,42.214) 24.004,42.214 23.96,42.257
+5VD: C1.1 C7.2 C8.2 C9.1 C10.2 C16.1 D3.1 P1.2 P1.5 P3.2 Q1.2 R1.1 R3.1 R4.1 R11.2 R16.1 R17.2 U1.7 U1.20 U2.2 U3.8 U4.3 U5.15 | length 234.6
  Top Layer w0.4: U4.3 5.64,22.3 4.192,20.852 4.192,17.206 4.624,16.775 v1(9.806,16.57) 10.668,17.432 C9.1 11.66,18.2 11.914,17.946 C7.2 15.008,20 16.1,20 U2.2@21.9,20 ; v1(12.25,44.816) R4.1 ; U5.15 20.594,40.568 v1(21.21,41.184) ; D3.1 25.736,21.302 27,22.566 ; v1(26.341,38.4) 26.391,38.35 R11.2 ; 30.85,8.25 30.85,5.562 30.48,5.192 P1.2 27,6.02 27,22.566 ; U3.8 v1(31.15,38.4) ; R1.1 R16.1 29.34,27.85 27.89,26.4 R17.2 27,22.566 ; Q1.2 Q1.2@37.314,46.7 ; v1(37.314,45.756) Q1.2@37.314,46.7 ; P1.5 38.1,8.89 U1.20 ; v1(45.873,38.136) 45.873,39.791 38.965,46.7 Q1.2@37.314,46.7
  Top Layer w1: U2.2@22,20.25 22,20.55 22.752,21.302 D3.1
  Bottom Layer w0.4: C10.2 6.627,19.75 v1(9.806,16.57) ; v1(12.25,44.816) 14.814,44.816 19.483,40.148 C16.1 ; v1(21.21,41.184) 21.625,40.769 C16.1 ; v1(26.341,38.4) 27.876,38.4 28.44,37.836 ; P1.2 31.689,1.331 36.891,1.331 P1.5 ; v1(31.15,38.4) C8.2 30.25,37.836 28.44,37.836 ; v1(37.314,45.756) 37.314,44.439 36.97,44.095 33.675,44.095 33.566,44.205 30.271,44.205 26.214,40.148 23.25,40.148 ; C1.1 42.775,15.914 ; v1(45.873,38.136) 54.789,29.221 64.72,29.221 ; C16.1 23.25,40.148 ; 23.25,40.148 25.562,37.836 28.44,37.836 ; 42.775,15.914 42.013,15.914 41.402,15.303 U1.20 42.775,13.565 42.775,15.914 ; 42.775,15.914 42.775,20.534 43.206,20.966 45.328,20.966 U1.7 46.482,21.371 51.711,26.6 64.284,26.6 64.72,27.036 64.72,29.221 ; 64.72,29.221 64.781,29.221 P3.2 64.72,29.221
+VIN: C3.1 C4.2 D1.2 D3.2 P1.8 R6.1 U2.3 | length 86.9
  Top Layer w0.4: U2.3 U2.3@16.55,17.7 ; C3.1 18.441,8.548 18.695,8.802 18.695,9.485 19.483,10.272 19.483,17.318 ; v1(22.558,8.664) D1.2@22.558,12 ; R6.1 35.902,30.4 35.586,30.084 35.586,25.207 37.644,23.15 v1(37.644,14.971)
  Top Layer w1: U2.3@16.55,17.7 19.8,17.7 19.85,17.65 23.39,17.65 23.442,17.702 D3.2@24.85,17.702 ; D1.2@22,12 21.775,12 21.65,12.125 21.65,14.302 24.85,17.502 D3.2@24.85,17.702 ; D3.2 25.05,17.902 D3.2@24.85,17.702
  Bottom Layer w0.4: v1(22.558,8.664) 22.25,8.356 C4.2 31.936,6.85 ; v1(37.644,14.971) 33.072,14.971 32.615,14.514 32.615,7.529 31.936,6.85 ; P1.8 41.41,6.85 31.936,6.85
A0: P4.1 U1.23 | length 10.4
  Top Layer w0.5: U1.23 50.8,10.414 P4.1
A1: P4.2 U1.24 | length 10.4
  Top Layer w0.5: U1.24 53.34,10.414 P4.2
A2: P4.3 U1.25 | length 10.4
  Top Layer w0.5: U1.25 54.102,4.318 P4.3
A3: P4.4 U1.26 | length 10.4
  Top Layer w0.5: U1.26 56.642,4.318 P4.4
A4_SDA: P4.5 P5.2 U1.27 | length 92.5
  Top Layer w0.254: U1.27 59.182,4.318 P4.5
  Bottom Layer w0.254: P5.2 40.697,52.381 61.143,52.381 62.104,51.42 62.104,33.539 62.612,33.031 67.209,33.031 67.819,32.421 67.819,12.228 65.254,9.663 63.095,9.663 60.96,7.528 P4.5
A5_SCL: P4.6 P5.1 U1.28 | length 81.6
  Top Layer w0.254: v1(57.126,49.515) 57.126,51.395 57.684,51.954 64.923,51.954 65.508,51.369 65.508,39.355 67.997,36.866 67.997,18.467 U1.28
  Top Layer w0.5: U1.28 61.722,4.318 P4.6
  Bottom Layer w0.254: P5.1 42.783,51.927 46.433,51.927 46.966,51.395 46.966,50.201 47.651,49.515 v1(57.126,49.515)
AREF: C2.1 P5.3 U1.21 | length 67.4
  Top Layer w0.254: P5.3 38.611,52.835 53.298,52.835 54.611,51.522 54.611,50.353 55.297,49.668 55.297,25.232 50.344,20.279 50.344,18.594 U1.21 43.942,10.679 44.4,10.221 C2.1
D0_RX: P6.1 P8.4 Q2.3 R16.2 U1.2 | length 126.7
  Top Layer w0.254: P8.4 9.398,26.441 ; v1(9.856,25.411) 9.398,25.869 9.398,26.441 ; Q2.3 19.63,33.285 18.01,33.285 17.451,32.726 17.451,30.897 17.248,30.694 14.835,30.694 13.351,29.21 13.351,28.235 14.022,27.564 14.022,24.014 13.565,23.556 12.283,23.556 9.398,26.441 ; v1(29.157,25.411) 29.897,26.15 R16.2 30.25,26.096 30.151,26.096 30.151,15.438 32.319,13.269 32.319,11.593 32.802,11.11 v1(37.415,11.11) ; U1.2 59.182,46.482 P6.1
  Bottom Layer w0.254: v1(9.856,25.411) v1(29.157,25.411) ; v1(37.415,11.11) 54.713,11.11 55.195,11.593 55.195,15.825 U1.2
D1_TX: P6.2 P8.5 U1.3 U5.4 | length 110.4
  Top Layer w0.254: v1(21.21,33.056) 21.21,38.586 21.921,39.298 U5.4 ; U1.3 58.675,21.845 58.675,48.515 P6.2
  Bottom Layer w0.254: P8.5 13.519,30.283 ; v1(21.21,33.056) 16.292,33.056 13.519,30.283 ; P6.2 49.464,39.304 43.315,39.304 42.923,38.912 36.579,38.912 33.885,36.218 32.258,36.218 23.867,27.827 19.959,27.827 17.503,30.283 13.519,30.283
D2: P6.3 U1.4 | length 32.8
  Top Layer w0.254: U1.4 57.075,22.785 57.075,48.156 58.42,49.502 P6.3
D3: P6.4 U1.5 | length 32.8
  Top Layer w0.254: U1.5 55.88,24.13 P6.4
D4: P6.5 U1.6 | length 34
  Top Layer w0.254: U1.6 54.829,25.619 54.829,49.311 P6.5
D5: P6.6 U1.11 | length 41.6
  Top Layer w0.254: v1(44.607,37.476) 46.585,37.476 47.118,38.009 47.118,51.42 47.625,51.927 49.673,51.927 P6.6
  Bottom Layer w0.254: U1.11 36.322,22.946 44.607,31.23 v1(44.607,37.476)
D6: P6.7 U1.12 | length 42.7
  Top Layer w0.254: v1(45.442,36.662) 47.726,36.662 48.26,37.196 P6.7
  Bottom Layer w0.254: U1.12 35.473,18.121 37.136,18.121 37.771,18.756 37.771,20.889 45.442,28.56 v1(45.442,36.662)
D7: P6.8 U1.13 | length 37
  Top Layer w0.254: v1(41.962,36.129) v1(41.962,39.558)
  Bottom Layer w0.254: U1.13 31.242,25.41 v1(41.962,36.129) ; v1(41.962,39.558) 45.72,43.317 P6.8
D8: P5.10 U1.14 | length 62.2
  Top Layer w0.254: v1(8.408,25.792) 8.256,25.944 8.256,29.957 8.688,30.389 12.625,30.389 13.227,30.991 13.227,35.698 12.549,36.376 12.549,43.622 12.904,43.978 12.904,47.991 13.686,48.773 16.769,48.773 P5.10
  Bottom Layer w0.254: v1(8.408,25.792) 8.662,26.046 29.567,26.046 29.795,25.817 29.795,20.905 U1.14
D9: P5.9 U1.15 | length 56.8
  Top Layer w0.254: v1(13.336,24.471) 10.811,26.996 10.811,29.514 11.126,29.829 13.141,29.829 13.681,30.369 13.681,36.545 13.012,37.214 13.012,42.552 13.398,42.938 13.398,47.769 13.947,48.319 18.855,48.319 P5.9
  Bottom Layer w0.254: v1(13.336,24.471) 16.423,24.471 U1.15
D10_SS: P5.8 R3.2 U1.16 | length 89
  Top Layer w0.254: v1(0.636,45.407) 0.636,27.697 v1(4.598,23.734) ; 29.15,8.25 29.15,10.1 U1.16
  Bottom Layer w0.254: v1(0.636,45.407) 2.176,46.947 16.735,46.947 17.891,45.791 22.083,45.791 24.055,47.763 24.055,49.82 P5.8 ; v1(4.598,23.734) 10.263,23.734 23.039,10.958 30.008,10.958 U1.16
D11_MOSI: P3.4 P5.7 U1.17 | length 94.5
  Top Layer w0.254: P5.7 27.574,49.642 29.338,49.642 32.132,46.848 32.132,41.282 32.088,41.238 32.088,34.301 32.453,33.936 33.231,33.936 34.327,32.839 34.327,24.964 32.691,23.328 32.691,13.805 32.773,13.723 32.773,13.201 U1.17
  Bottom Layer w0.254: U1.17 35.524,10.45 63.552,10.45 67.184,14.082 67.184,26.796 P3.4
D12_MISO: P3.1 P5.6 U1.18 | length 109.5
  Top Layer w0.254: P5.6 32.586,47.17 32.586,41.094 32.542,41.05 32.542,34.974 33.118,34.398 33.885,34.398 34.781,33.501 34.859,32.253 34.859,27.076 34.962,26.973 34.962,13.552 U1.18 37.399,13.269 42.038,13.269 42.495,12.812 42.495,8.062 42.038,7.605 42.038,1.839 42.47,1.408 59.132,1.408 59.564,1.839 59.564,3.186 58.091,4.659 58.091,13.574 60.275,15.759 60.275,27.255 P3.1
D13_SCK: P3.3 P5.5 U1.19 U3.3 | length 109.4
  Top Layer w0.254: U3.3 29.948,42.873 29.948,43.135 30.077,43.454 30.452,43.868 v1(31.421,45.4) ; P3.3 64.644,29.084 64.644,33.589 64.009,34.224 v1(64.009,47.661)
  Bottom Layer w0.254: v1(31.421,45.4) 35.129,49.109 35.129,51.446 34.697,51.877 32.573,51.877 ; P5.5 32.573,51.877 ; U1.19 40.133,13.463 40.133,21.321 46.752,27.94 P3.3 ; v1(64.009,47.661) 64.898,48.55 64.898,51.928 63.991,52.835 33.531,52.835 32.573,51.877
DTR: C18.1 P8.6 Q3.3 R17.1 | length 58.5
  Top Layer w0.254: v1(19.407,29.887) 19.584,30.065 22.359,30.065 23.22,30.926 Q3.3 ; v1(20.346,28.484) 20.128,28.702 P8.6 15.08,28.1 R17.1 28.37,28.1 v1(28.373,28.103) ; v1(50.305,35) C18.1
  Bottom Layer w0.254: v1(19.407,29.887) 19.407,29.424 v1(20.346,28.484) ; v1(28.373,28.103) 33.021,28.103 43.715,38.796 46.508,38.796 v1(50.305,35)
GND: C1.2 C2.2 C3.2 C4.1 C5.2 C6.2 C7.1 C8.1 C9.2 C10.1 C11.1 C12.2 C13.2 C14.1 C15.1 C16.2 C17.1 D2.2 D4.2 P1.6 P1.7 P2.2 P2.3 P3.6 P5.4 P7.4 P7.5 P7.6 P8.1 R7.2 R10.2 S1.1 U1.8 U1.22 U2.1 U3.4 U4.1 U5.6 U5.16 | length 363.4
  Top Layer w0.4: P8.1 1.778,29.539 P7.6 P7.6@5.658,33.419 ; 7.327,4.25 7.96,3.617 P2.3 ; U4.1 8.688,17.7 9.043,18.056 9.043,19.443 9.501,19.9 C9.2 ; S1.1@9.817,47.534 1.867,47.534 1.867,44.906 2.475,44.298 P7.5 4.497,39.968 P7.4 7.207,34.968 P7.6@5.658,33.419 ; U2.1 14.739,22.3 12.954,20.515 C7.1 11.914,19.646 11.66,19.9 C9.2 ; C13.2 v1(16.474,46.315) ; v1(17.019,38.009) 17.019,39.298 C12.2 16.85,39.933 U5.16 21.286,39.933 21.921,40.568 U5.6 ; C3.2 20.047,3.453 v1(22.25,3.453) ; v1(21.915,28.789) 22.21,29.084 32.961,29.084 33.5,29.623 C17.1 ; v1(28.515,40.121) 28.506,40.13 28.506,41.197 29.01,41.7 29.175,41.7 29.2,41.725 U3.4 ; R10.2 33.75,47.501 34.036,47.787 P5.4 ; D2.2 36.5,28.534 37.415,29.449 37.415,33.056 36.5,33.971 R7.2 C14.1 39.686,38.4 40.59,39.304 v1(40.59,40.397) ; P1.7 46.1,5.46 C2.2 46.1,10.272 46.482,10.654 U1.22 ; C6.2 43.6,21.689 43.942,21.347 U1.8 ; v1(47.855,17.638) 47.855,20.559 49.426,22.131 50.237,22.131 50.85,22.744 C5.2 50.85,23.787 54.302,27.239 54.302,29.678 52.6,31.38 D4.2 ; P7.6@5.658,33.419 5.658,27.297 10.668,22.287 C9.2
  Top Layer w1: P2.2 4.96,7.37 7.327,5.003 7.327,4.25 7.327,3.173 P2.3@8,2.5 ; P2.3 10.87,2.62 11.65,3.4 11.65,3.473 13.677,5.5 C3.2@17.875,5.5
  Bottom Layer w0.4: P8.1 1.778,18.507 2.185,18.1 C11.1 4.497,18.1 4.547,18.05 C10.1 6,13.344 4.96,12.304 P2.2 ; P7.5 6.717,46.315 ; P7.4 8.397,38.447 12.788,38.447 13.524,37.712 14.933,37.712 15.669,38.447 17.458,38.447 ; v1(17.019,38.009) 17.458,38.447 ; v1(21.915,28.789) 21.915,33.466 21.625,33.756 21.625,37.196 ; v1(22.25,3.453) C4.1 38.03,5.15 P1.6 P1.7 ; v1(28.515,40.121) 28.525,40.111 30.239,40.111 C8.1 31.743,40.1 32.199,39.644 32.199,37.593 31.802,37.196 24.925,37.196 23.674,38.447 C16.2 ; P5.4 28.078,44.842 23.826,44.842 22.942,43.958 C15.1 21.625,45.03 21.391,45.264 17.524,45.264 v1(16.474,46.315) ; v1(40.59,40.397) 37.282,40.397 33.631,36.745 22.076,36.745 21.625,37.196 ; U1.8 45.466,18.288 C1.2 46.151,17.614 ; U1.22 46.482,17.283 46.151,17.614 ; P3.6 61.602,20.962 48.283,20.962 47.855,20.534 v1(47.855,17.638) 47.83,17.614 46.151,17.614 ; 6.717,46.315 v1(16.474,46.315) ; 6.717,46.315 v1(16.474,46.315) ; 17.458,38.447 C16.2 ; 21.625,37.196 C16.2
NetC5_1: C5.1 R2.2 U1.9 Y1.1 | length 24.3
  Top Layer w0.254: U1.9 42.484,18.73 44.451,18.73 45.035,19.315 45.035,20 48.285,23.25 C5.1 49.15,28.448 Y1.1@50.699,28.448 ; R2.2 48.286,32.75 50.699,30.337 Y1.1@50.699,28.448 ; Y1.1 Y1.1@50.699,28.448
NetC6_1: C6.1 R2.1 U1.10 Y1.2 | length 18.7
  Top Layer w0.254: U1.10 38.862,22.566 39.546,23.25 C6.1 C6.1@41.9,23.5 ; C6.1@41.75,23.5 41.652,23.598 Y1.2 44.451,28.448 45.05,29.047 R2.1
NetC12_1: C12.1 P7.2 R8.2 | length 8.7
  Top Layer w0.254: v1(14.098,38.695) 14.581,39.298 C12.1 15.15,40.143 14.957,40.335 R8.2
  Bottom Layer w0.254: P7.2 13.035,39.758 v1(14.098,38.695)
NetC13_1: C13.1 P7.3 R9.2 | length 11.3
  Top Layer w0.254: v1(14.606,42.225) 14.957,42.577 R9.2 14.957,44.205 14.774,44.389 C13.1
  Bottom Layer w0.254: P7.3 9.675,42.225 v1(14.606,42.225)
NetC14_2: C14.2 R6.2 R7.1 U3.5 | length 27.3
  Top Layer w0.254: U3.5 v1(29.2,38.542) ; v1(36.298,41.641) 36.5,41.439 R7.1 ; R6.2 35.882,32.1 35.663,32.319 35.663,39.838 35.925,40.1 R7.1 ; C14.2 R7.1
  Bottom Layer w0.254: v1(29.2,38.542) 27.865,39.878 27.865,40.93 28.576,41.641 v1(36.298,41.641)
NetD1_1: D1.1 P2.1 | length 7.6
  Top Layer w1: P2.1@11.5,7.5 11.5,7.534 12.315,8.348 13.498,8.348 16.9,11.75 D1.1
NetD2_1: D2.1 R1.2 | length 5.4
  Top Layer w0.254: v1(33.5,25.207) R1.2 ; D2.1 37.021,25.629 v1(36.6,25.207)
  Bottom Layer w0.254: v1(33.5,25.207) v1(36.6,25.207)
NetD4_1: D4.1 R5.2 | length 5
  Top Layer w0.254: R5.2 48.146,35 50.396,32.75 D4.1
NetD5_1: D5.1 R12.1 | length 13.7
  Top Layer w0.254: D5.1@25.443,47.391 25.523,47.195 25.913,47.195 26.061,47.046 26.061,44.834 26.368,44.528 26.368,42.738 26.738,42.368 27.191,42.368 27.262,42.368 27.322,42.405 29.902,43.959 29.998,44.056 29.998,47.153 29.924,47.227 29.651,47.5 R12.1@29.1,47.5
NetD5_2: D5.2 U5.17 | length 27.7
  Top Layer w0.254: v1(16.105,47.686) 15.901,47.686 13.869,45.654 13.869,39.86 13.466,39.457 13.466,37.879 13.971,37.374 17.502,37.374 17.73,37.603 17.73,39.025 18.003,39.298 U5.17 ; v1(21.75,46.423) 21.75,46.519 22.177,46.946 22.177,47.154 22.523,47.5 D5.2@23.4,47.5
  Bottom Layer w0.254: v1(16.105,47.686) 16.816,48.398 19.786,48.398 21.75,46.434 v1(21.75,46.423)
NetD6_1: D6.1 R13.1 | length 13.1
  Top Layer w0.254: D6.1@23.15,46 22.941,45.791 21.488,45.791 21.118,46.161 21.118,47.439 22.709,49.029 25.252,49.029 26.519,47.763 26.519,45.731 26.749,45.5 27.4,45.5
NetD6_2: D6.2 U5.10 | length 5.2
  Top Layer w0.254: U5.10 24.918,43.108 24.962,43.064 25.66,43.064 25.765,43.064 25.914,43.212 25.914,43.45 25.914,44.34 25.544,44.71 25.544,45.006 24.85,45.7 D6.2@24.85,46
NetF1_1: F1.1 P7.1 | length 6
  Top Layer w0.254: P7.1 11.214,35.251 11.657,35.251 12.15,34.758 F1.1
NetQ1_1: Q1.1 R11.1 U3.7 | length 23.7
  Top Layer w0.254: v1(26.239,41.438) 28.093,39.584 28.093,36.955 27.789,36.65 R11.1 27.25,35.906 27.789,35.367 30.297,35.367 30.5,35.571 U3.7 ; v1(35.891,44.8) Q1.1
  Bottom Layer w0.254: v1(26.239,41.438) 27.169,42.368 27.262,42.368 29.662,44.769 35.86,44.769 v1(35.891,44.8)
NetQ2_2: Q2.2 R14.2 U5.20 | length 22.8